# Altium PCB PCB11.PcbDoc
Units mil, origin at the board's own origin, x right, y up, seen from the top; angles counter-clockwise.
Board outline 3605 x 3120 mil, 2 copper layers (Top Layer, Bottom Layer); 30 components, 39 nets, 137 pads, 0 vias.
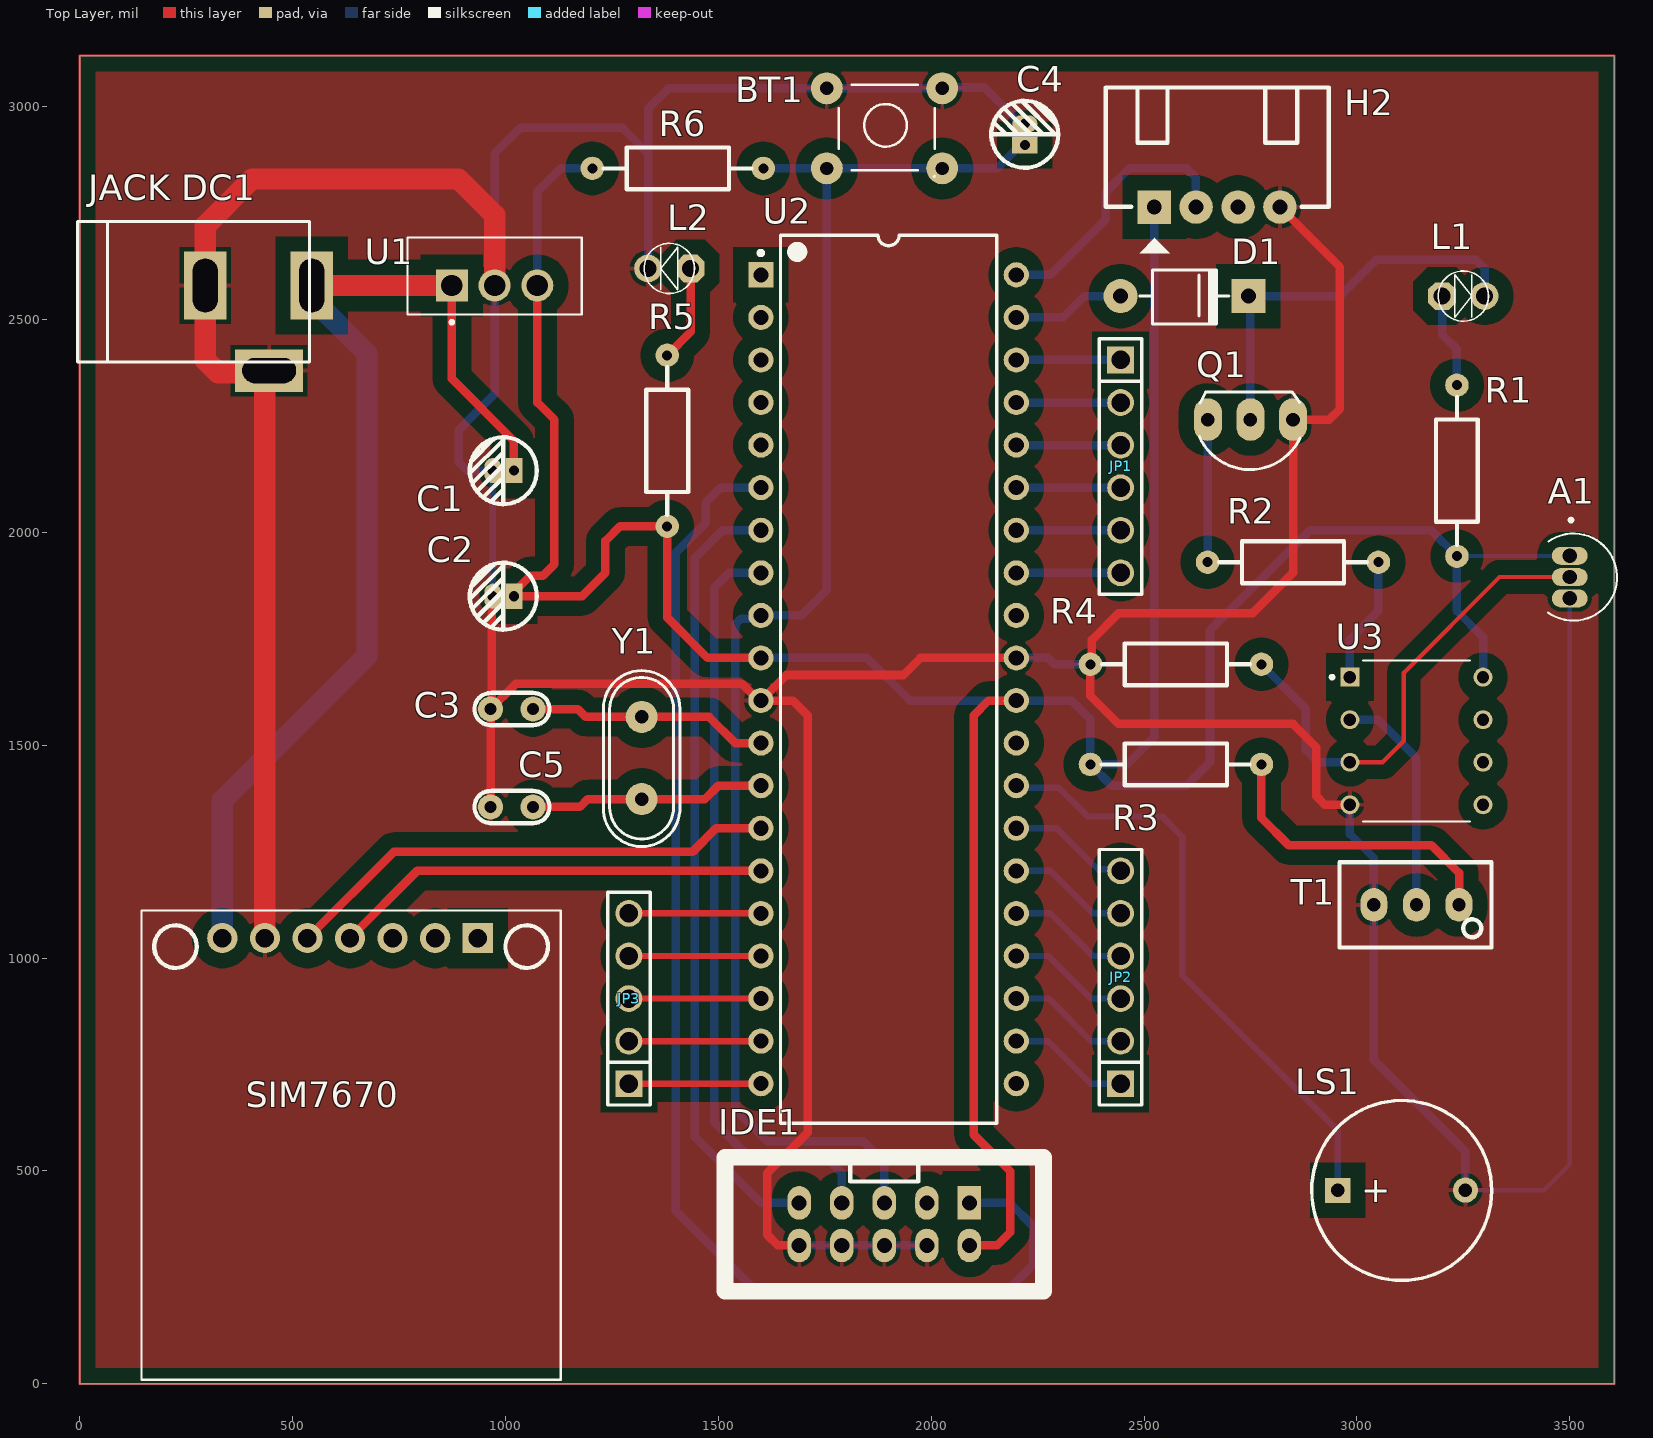
[diagram p0: Top Layer view]
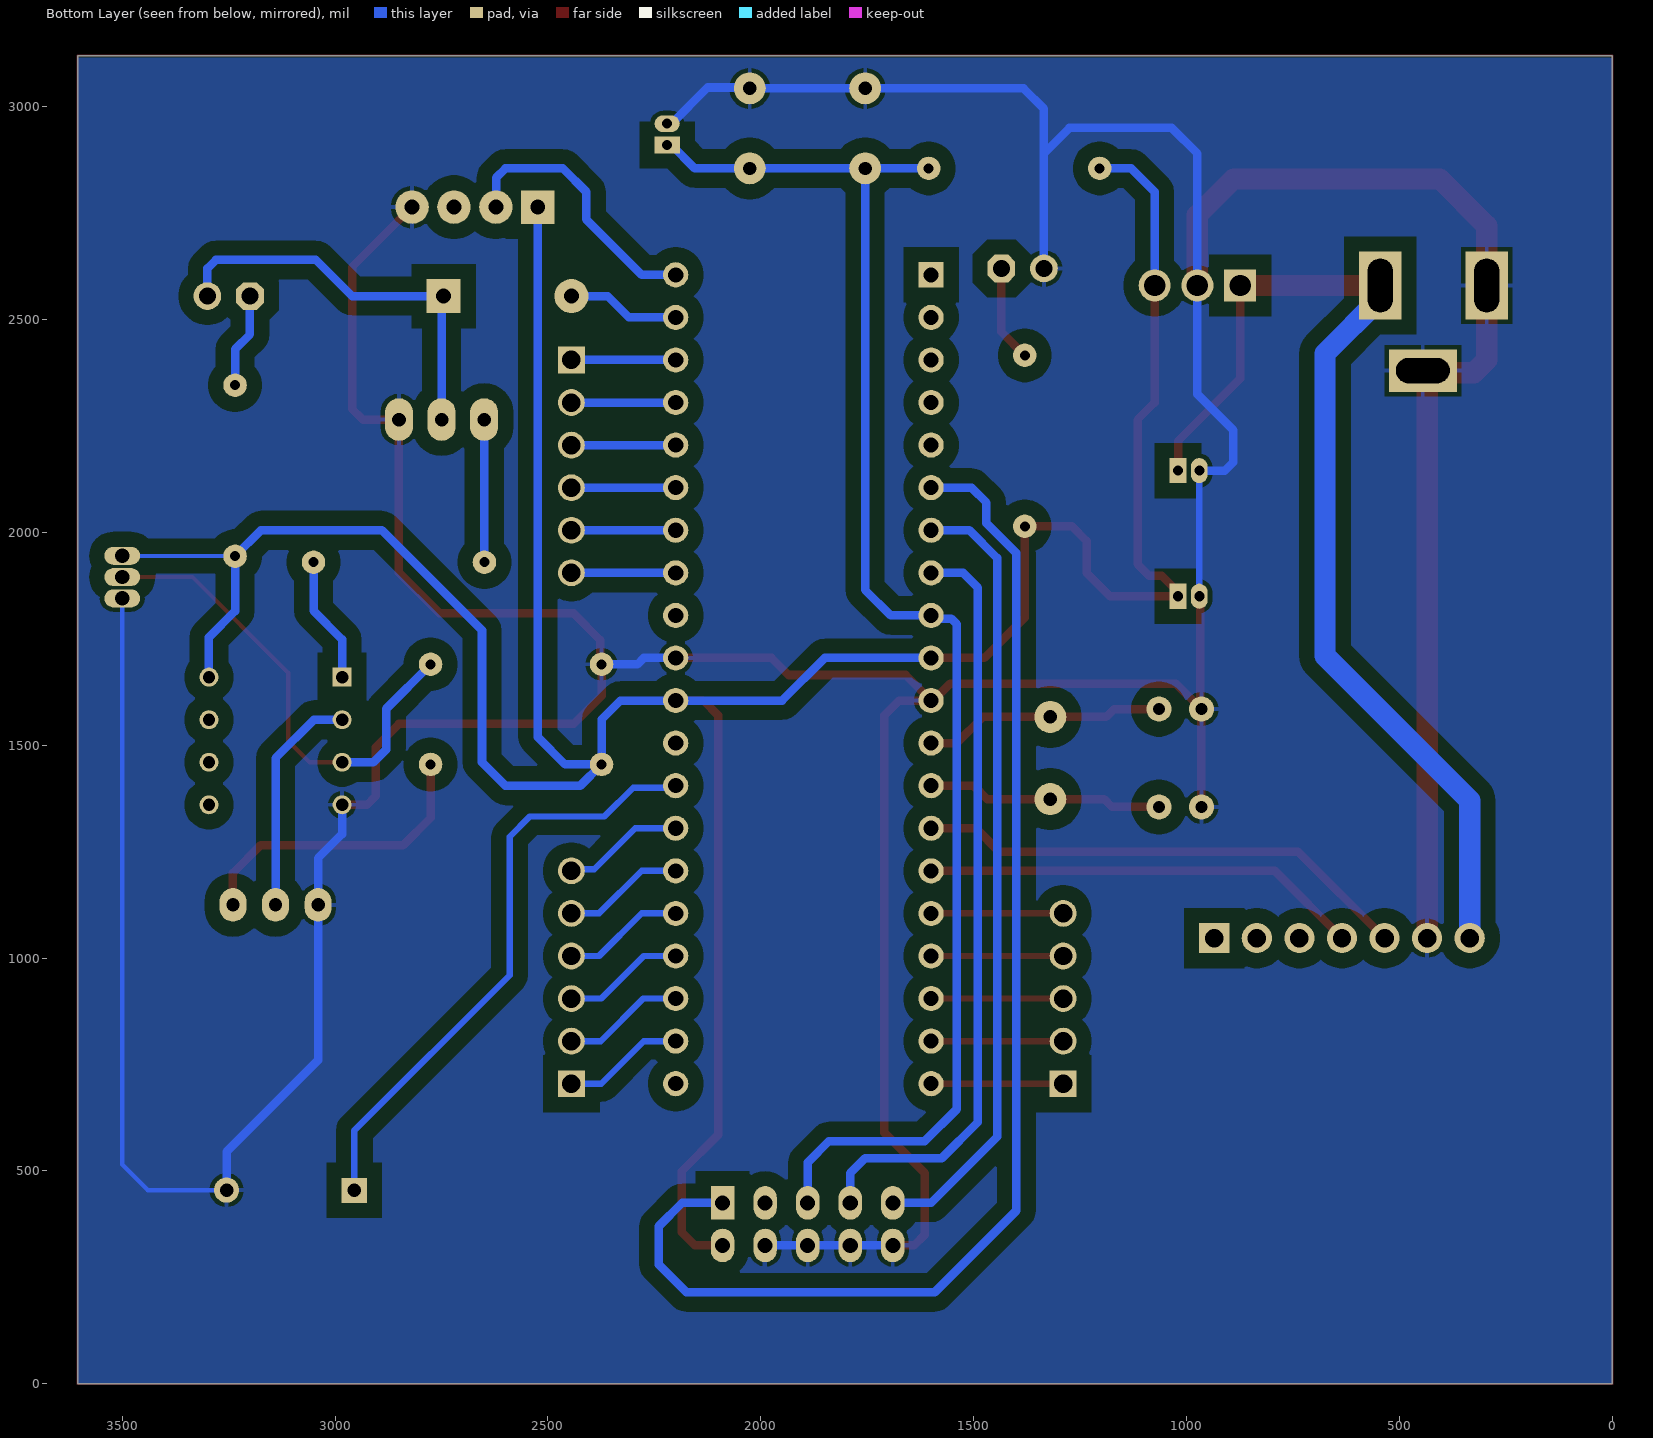
[diagram p1: Bottom Layer view, seen from below]
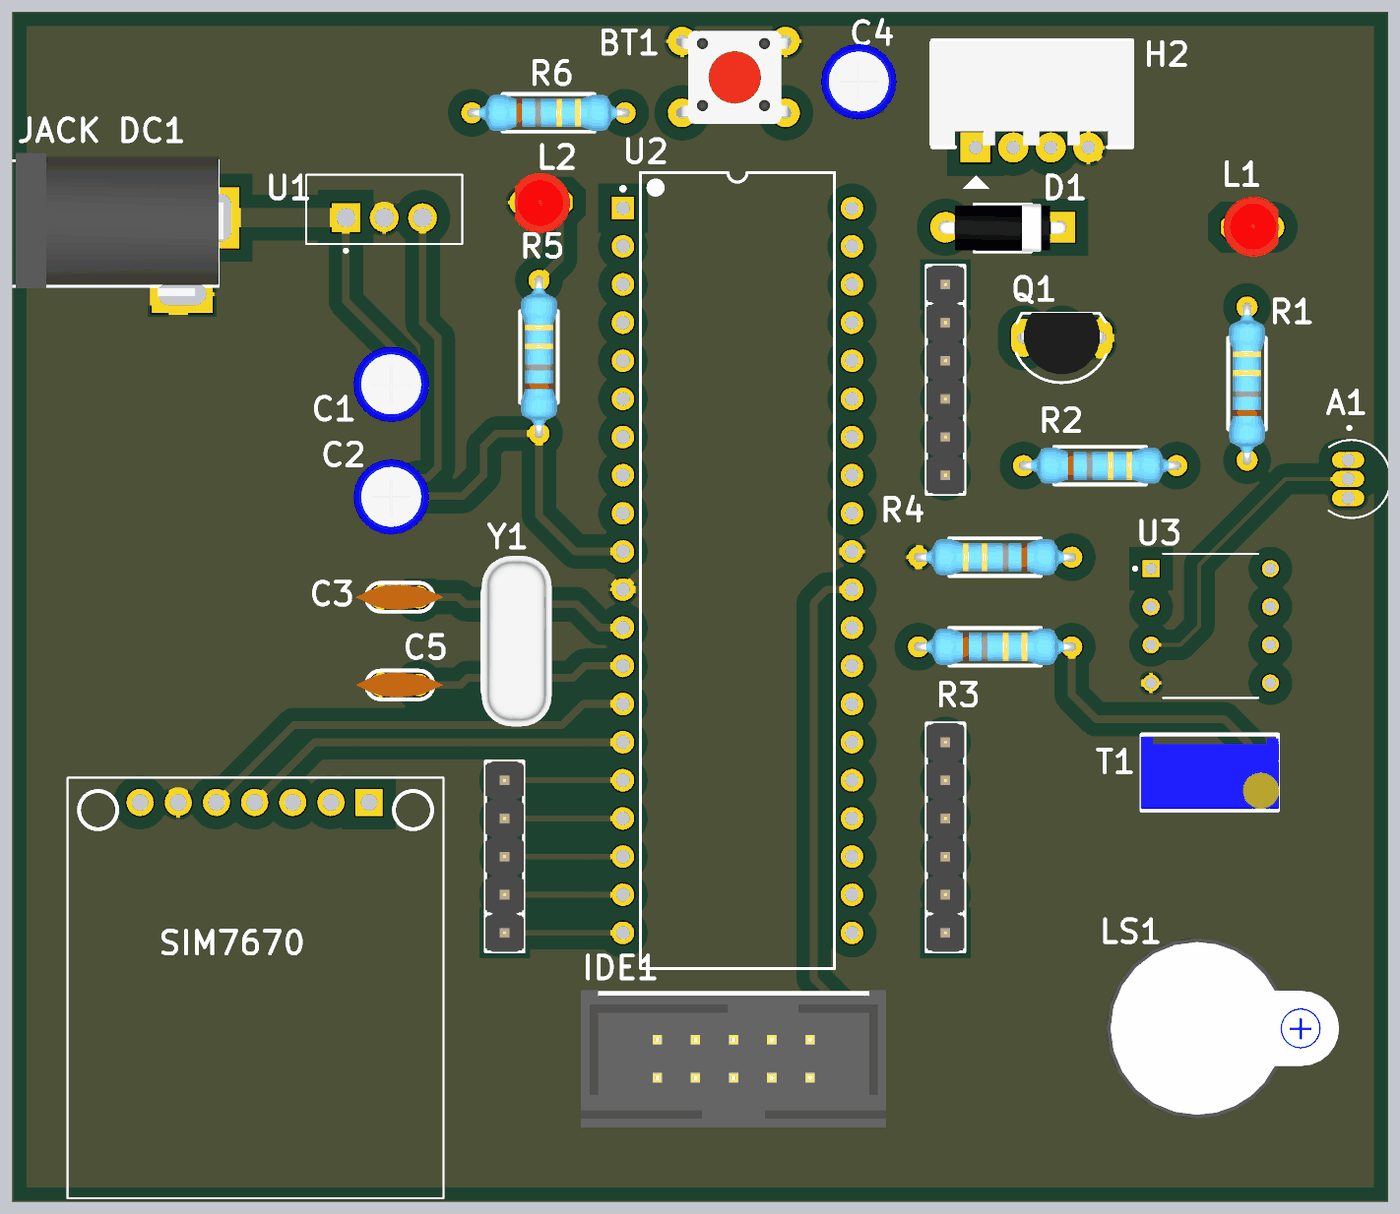
[diagram p2: 3D render of the assembled board from above, using the file's embedded part models]

## Layer stack, top to bottom
Top Solder: solder mask 0.4, Solder Resist, Dk 3.5
Top Layer: signal copper 1.4
Dielectric 1: dielectric 12.6, FR-4, Dk 4.8
Bottom Layer: signal copper 1.4
Bottom Solder: solder mask 0.4, Solder Resist, Dk 3.5

## Board outline
0,0 3605,0 3605,3120 0,3120

## Design rules (kind name [scope] priority, off if disabled: settings)
Clearance [All] p1: gap=35 ignorepadtopadclearanceinfootprint=FALSE
PolygonConnect [All] p1: connectstyle=Relief reliefconductorwidth=10 reliefentries=4 polygonreliefangle="90 Angle" airgapwidth=10
RoutingVias [All] p1: holewidth=28 width=50 viastyle="Through Hole" minholewidth=28 minwidth=50 maxholewidth=28 maxwidth=50
SolderMaskExpansion [All] p1: expansion=4 istentingtop=FALSE
Width [All] p1: maxlimit=50 minlimit=15 preferedwidth=20
30 further rules are at their usual default settings.

## Components (designator, comment, footprint, x,y, rotation, side; value= is the part's Value field where it differs from the comment)
A1 "LM35DZ/NOPB" TO92127P521H735-3 3530.51,1895 r270 top
BT1 "Nut Nhan" "Nut Nhan 4 Chan Cam 6x6" 1768,3051 r0 top
C1 "10uF" "tu hoa 4mm" 995,2145 r180 top
C2 "0.1uF" "tu hoa 4mm" 995,1850 r180 top
C3 "22pF" "tu gom" 1015,1585 r180 top
C4 "10uF" "tu hoa 4mm" 2220,2935 r90 top
C5 "22pF" "tu gom" 1015,1355 r180 top
D1 "100v" "DIODE 1A" 2395,2555 r180 top
H2 "MD GAS" "Header 4P DC 2.54" 2525,2765 r90 top
IDE1 "IDE10" "IDE 10 DT" 2090,425 r180 top
"JACK DC1" "JACK DC 5.5" "JACK DC 5.5" 420,2480 r0 top value="Jac DC"
JP1 "JP 1x6 2.54" "JP 1x6 DT" 2445,2405 r270 top
JP2 "JP 1x6 2.54" "JP 1x6 DT" 2445,705 r90 top
JP3 "JP 1x5 2.54" "JP 1x5 DT" 1290,705 r90 top
L1 "LED 3mm" LED-3MM-RED 3200,2555 r0 top
L2 "LED 3mm" LED-3MM-RED 1435,2620 r180 top
LS1 "Coi Chip Speaker" "Coi Chip Speacker" 2955,454.5 r0 top
Q1 "C1815" TO92 2750,2265 r180 top value=C9014
R1 "1k" "tro vach 1/4w" 3235,2145 r270 top
R2 "10k" "tro vach 1/4w" 2850,1930 r180 top
R3 "10k" "tro vach 1/4w" 2575,1455 r180 top
R4 "1k" "tro vach 1/4w" 2575,1690 r0 top
R5 "470" "tro vach 1/4w" 1380,2215 r270 top
R6 "10k" "tro vach 1/4w" 1405,2855 r180 top
SIM7670 "Component_1" SIM7670X 625,570 r180 top
T1 "10K" "Bien Tro Vi Chinh Dung" 3140,1125 r180 top
U1 "LM7805" TO255P1040X460X1968-3 874.21,2580 r0 top
U2 "ATmega32-16PU" 40P6 1900,1655 r0 top
U3 "LM358N/NOPB" DIP794W45P254L959H508Q8 3140,1510 r0 top
Y1 "12Mhz" "Thach Anh 2 chan cam" 1320,1470 r90 top value=4Mhz

## Footprints (in the part's own frame and the unit in brackets; to place one, negate y for a bottom-side part, rotate by r counter-clockwise, add the part's x,y. Pads: shape width x height; smd on the part's side, far side on the other; paste and mask are expansions set on the pad)
40P6 [mm] "40-Pin Ceramic Dual In-Line Package (CerDIP)"
  rect 1.5x1.5 hole 0.9: 1(-7.62,24.13)
  round 1.5 hole 0.9: 2(-7.62,21.59) 3(-7.62,19.05) 4(-7.62,16.51) 5(-7.62,13.97) 6(-7.62,11.43) 7(-7.62,8.89) 8(-7.62,6.35) 9(-7.62,3.81) 10(-7.62,1.27) 11(-7.62,-1.27) 12(-7.62,-3.81) 13(-7.62,-6.35) 14(-7.62,-8.89) 15(-7.62,-11.43) 16(-7.62,-13.97) 17(-7.62,-16.51) 18(-7.62,-19.05) 19(-7.62,-21.59) 20(-7.62,-24.13) 21(7.62,-24.13) 22(7.62,-21.59) 23(7.62,-19.05) 24(7.62,-16.51) 25(7.62,-13.97) 26(7.62,-11.43) 27(7.62,-8.89) 28(7.62,-6.35) 29(7.62,-3.81) 30(7.62,-1.27) 31(7.62,1.27) 32(7.62,3.81) 33(7.62,6.35) 34(7.62,8.89) 35(7.62,11.43) 36(7.62,13.97) 37(7.62,16.51) 38(7.62,19.05) 39(7.62,21.59) 40(7.62,24.13)
  silkscreen extent -7.74,-26.5 6.45,26.5, body extent -7.05,-26.47 7.05,26.47, height 5.72
"Bien Tro Vi Chinh Dung" [mm] "Bien tro vi chinh"
  oval 1.6x2 hole 0.8: 1(-2.54,0) 2(0,0) 3(2.54,0)
  silkscreen extent -4.47,-2.54 4.6,2.54, body extent -4.54,-2.4 4.66,2.4, height 12.02
"Coi Chip Speacker" [mm]
  rect 1.5x1.5 hole 0.8: 1(0,0)
  round 1.5 hole 0.8: 2(7.62,0.013)
  silkscreen extent -1.55,-5.38 9.18,5.36, body extent -2.22,-6 13.24,6, height 4.5
"DIODE 1A" [mil] "Diode 1A"
  round 80 hole 35: 1(-50,0)
  rect 80x80 hole 35: 2(-350,0)
  silkscreen extent -305,-61 -95,65, body extent -366,-61 -34,65, height 122
DIP794W45P254L959H508Q8 [mm]
  rect 1.13x1.13 hole 0.74: 1(-3.97,3.81)
  round 1.13 hole 0.74: 2(-3.97,1.27) 3(-3.97,-1.27) 4(-3.97,-3.81) 5(3.97,-3.81) 6(3.97,-1.27) 7(3.97,1.27) 8(3.97,3.81)
  silkscreen extent -5.13,-4.79 3.17,4.79
"Header 4P DC 2.54" [mil]
  rect 78.74x78.74 hole 35: 1(-1,1)
  round 78.74 hole 35: 2(-1,-97.43) 3(-1,-195.85) 4(-1,-294.28)
  silkscreen extent -110,-409 280,115, body extent 5,-413 278,123, height 290
"IDE 10 DT" [mm] "Connector; Header; 5x2 Position"
  rect 1.4x2 hole 0.9: 1(0,0)
  oval 1.4x2 hole 0.9: 2(0,2.54) 3(2.54,0) 4(2.54,2.54) 5(5.08,0) 6(5.08,2.54) 7(7.62,0) 8(7.62,2.54) 9(10.16,0) 10(10.16,2.54)
  silkscreen extent -4.42,-2.73 14.58,5.27, body extent -5.08,-3.3 15.24,5.84, height 9.86
"JACK DC 5.5" [mil] "Jac DC input"
  rect 100x160 hole 59.06 slot 125.98 at 90 deg: 1(125,100) 2(-125,100)
  rect 160x100 hole 59.06 slot 125.98 at 0 deg: 3(25,-100)
  silkscreen extent -425,-80 120,250, body extent -410,-105 134,269, height 434
"JP 1x5 DT" [mm] "5 pins, 1 row, straight, gold plating"
  rect 1.6x1.6 hole 1.1: 1(0,0)
  round 1.6 hole 1.1: 2(2.54,0) 3(5.08,0) 4(7.62,0) 5(10.16,0)
  silkscreen extent -1.27,-1.27 11.43,1.27, body extent -1.27,-1.27 11.43,1.27, height 8.54
"JP 1x6 DT" [mm] "6 pins, 1 row, straight, gold plating"
  rect 1.6x1.6 hole 1.1: 1(0,0)
  round 1.6 hole 1.1: 2(2.54,0) 3(5.08,0) 4(7.62,0) 5(10.16,0) 6(12.7,0)
  silkscreen extent -1.27,-1.27 13.97,1.27, body extent -1.27,-1.27 13.97,1.27, height 8.54
LED-3MM-RED [mil]
  oct 65x65 hole 40: 1(0,0)
  round 65 hole 40: 2(100,0)
  silkscreen extent -9,-59 109,59, body extent -27,-77 117,80, height 181
"Nut Nhan 4 Chan Cam 6x6" [mil] "SW button 4pin, 250 x250 mil"
  round 75 hole 31: 1(-13,-8) 1(258,-8) 2(-13,-196) 2(258,-196)
  silkscreen extent 15,-215 240,0, body extent -31,-225 281,19, height 276
SIM7670X [mm]
  rect 1.8x1.8 hole 1.1: 1(-7.874,-12.114)
  round 1.8 hole 1.1: 2(-5.334,-12.114) 3(-2.794,-12.114) 4(-0.254,-12.114) 5(2.286,-12.114) 6(4.826,-12.114) 7(7.366,-12.114)
  silkscreen extent -12.83,-13.77 12.19,14.25
"Thach Anh 2 chan cam" [mm]
  round 1.905 hole 0.8: 1(-2.45,0) 2(2.45,0)
  silkscreen extent -5.28,-2.29 5.21,2.29, body extent -5.68,-2.36 5.68,2.29, height 3.5
TO92 [mil] "TO-92"
  oval 66x100 hole 32: 1(-100,0) 2(0,0) 3(100,0)
  silkscreen extent -117,-65 120,118, body extent -109,-66 109,95, height 245
TO255P1040X460X1968-3 [mm]
  rect 1.91x1.91 hole 1.27: 1(0,0)
  round 1.91 hole 1.27: 2(2.55,0) 3(5.1,0)
  silkscreen extent -2.65,-2.29 7.75,2.86
TO92127P521H735-3 [mm]
  oval 1.07x2.14 hole 0.85: 1(-1.27,-0.775) 2(0,-0.775) 3(1.27,-0.775)
  silkscreen extent -3.5,-2.08 2.6,2.04
"tro vach 1/4w" [mm]
  round 1.4 hole 0.6: 1(-5.1,0) 2(5.1,0)
  silkscreen extent -4.39,-1.25 4.42,1.25, body extent -5.38,-1.2 5.38,1.2, height 2.41
"tu gom" [mm] "Tu gom mini"
  round 1.5 hole 0.7: 1(-1.27,0) 2(1.27,0)
  silkscreen extent -2.25,-0.97 2.22,0.97, body extent -2.92,-0.85 2.92,0.85, height 6.12
"tu hoa 4mm" [mm]
  rect 1x1.5 hole 0.6: 1(-0.635,0)
  oval 1x1.5 hole 0.6: 2(0.635,0)
  silkscreen extent -2,-2 2.01,2.01, body extent -2.47,-2.47 2.58,2.58, height 14.81

## Part data
A1 U1: Package=None, Availability=Unavailable, Price=None
  A1: MP=LM35DZ/NOPB
  U1: MP=LM7805
BT1: library part "Nut Nhan 4 Chan Cam 6x6", "Nut Nhan 4 Chan 6x6mm", Ma_Hang=MH004584, Ten="Nút Nhấn 4 Chân 6x6x5MM DIP"
C1 C2: library part "Tu Hoa 2.2uF 50V 4x7", "Cắm", Chung_Loai=Cắm, Don_Vi=Con, Ma_Hang=MH001356, So_Chan=2, Ten_Linh_Kien="Tụ Hóa 2.2uF 50V 4x7MM"
C3 C5: library part "Tu gom 22pF 50V", "Cắm", Chung_Loai=Cắm, Don_Vi=Con, Ma_Hang=MH004771, So_Chan=2, Ten_Linh_Kien="Tụ gốm 22P 50V"
C4: library part "Tu Hoa 10uF 25V 4x7", "Cắm", Chung_Loai=Cắm, Don_Vi=Con, Ma_Hang=MH001349, So_Chan=2, Ten_Linh_Kien="Tụ Hóa 10uF 25V 4x7MM"
D1: library part "Diode 1N4007", "Cắm", Chung_Loai=Cắm, Don_Vi=Con, Ma_Hang=MH001063, Ten_Linh_Kien="Diode 1N4007 1A (DIP)"
H2: library part "Header 4P 2.54 Duc Cong", "Cắm", Chung_Loai=Cắm, Don_Vi=Con, Ma_Hang=MH001310, Ten_Linh_Kien="Header 4P XH2.54-4P Đực Cong"
IDE1: library part "IDE 10 DT"
JP1 JP2: library part "JP 1x6 2.54 Duc Thang", "Cắm", Chung_Loai=Cắm, Don_Vi=Con, Ma_Hang=MH000903, Ten_Linh_Kien="Jump Đơn Đực 2.54MM 1x40P Thẳng 11MM"
JP3: library part "JP 1x5 2.54 Duc Thang", "Cắm", Chung_Loai=Cắm, Don_Vi=Con, Ma_Hang=MH000903, Ten_Linh_Kien="Jump Đơn Đực 2.54MM 1x40P Thẳng 11MM"
L1 L2: library part "LED 3mm Do", "Cắm", Chung_Loai=Cắm, Don_Vi=Con, Ma_Hang=MH003892, Ten_Linh_Kien="Led 3MM Phủ Đỏ (10c)"
LS1: "Còi chip"
Q1: "NPN transistor"
R1 R2 R3 R5: library part "Tro Vach 1/4W 5% 10k", "Căm", Chung_Loai=Cắm, Don_Vi=Con, Ma_Hang=MH007354, So_Chan=2, Ten_Linh_Kien="Trở Vạch 1/4w 5% 10K"
R4 R6: library part "Tro Vach 1/4W 5% 1k", "Cắm", Chung_Loai=Cắm, Don_Vi=Con, Ma_Hang=MH007390, So_Chan=2, Ten_Linh_Kien="Trở Vạch 1/4w 5% 1k"
T1: library part "Bien Tro Tinh Chinh 10K Dung", "Cắm", Chung_Loai=Cắm, Don_Vi=Con, Ma_Hang=MH003232, Ten_Linh_Kien="Biến Trở VR 103-10K 3296W"
U2: library part ATMEGA32-16PU, "8-bit AVR Microcontroller, 4.5-5.5V, 16MHz, 32KB Flash, 1024 Bytes EEPROM, 2KB SRAM, 40-pin PDIP, Industrial Grade (-40°C to 85°C)", Code_JEDEC=MS-011-AC, ComponentLink1Description="Manufacturer URL", ComponentLink1URL=http://www.atmel.com/, ComponentLink2Description="ATmega32(L) Datasheet", ComponentLink2URL=http://atmel.com/dyn/resources/prod_documents/doc2503.pdf, ComponentLink3Description="ATmega32(L) Summary", ComponentLink3URL=http://atmel.com/dyn/resources/prod_documents/2503S.pdf, DatasheetVersion="revQ, Feb-2011", PackageDescription="40-lead (0.600\"/15.24mm Wide) Plastic Dual Inline Package (PDIP)", PackageReference=40P6, PackageVersion="revB, Sep-2001", PartNumber=ATMEGA32-16PU
U3: "<a href=\"https://snapeda.com/parts/LM358N/NOPB/Texas%20Instruments/view-part/?ref=eda\">Check prices</a>", Package=None, Availability=Unavailable, MP=LM358N/NOPB, Price=None
Y1: library part "Thach Anh 2 chan Cam", "Crystal For all Crystal 2pin."

## Nets (pads, with @x,y where several pads share a name; then routed paths per layer and width w, separated by ;. In a path a pad name is that pad's centre, name@x,y a point inside that pad or via, vN(x,y) a via of type N, cw(c..) or ccw(c..) an arc to the next point about the centre after c; other vN are vias at no path point)
+5: A1.1 C2.1 H2.1 IDE1.2 R1.2 R3.2 R5.2 R6.2 U1.3 U2.10 U2.30 U3.8 | length 7866.8
  Top Layer w20: U1.3 1075,2305 1115,2265 1115,1925 1087.81,1897.81 1057.97,1897.81 1020,1859.84 C2.1 1180,1850 1235,1905 1235,1980 1269.21,2014.21 R5.2 1380,1800 1475,1705 U2.10 ; IDE1.2 2155,325 2186.25,356.25 2186.25,498.75 2100,585 2100,1570 2135,1605 U2.30
  Bottom Layer w10: R1.2 3235.39,1944.61 3499.61,1944.61 A1.1
  Bottom Layer w20: U1.3 1075,2800 1130,2855 R6.2 ; U2.10 1850,1705 1950,1605 U2.30 2330,1605 2374.21,1560.79 R3.2 ; H2.1 2524,1519 2460,1455 R3.2 ; U3.8 3296.3,1753.7 3235,1815 R1.2 3174.21,2005 2890,2005 2655,1770 2655,1460 2600,1405 2424.21,1405 R3.2
Coi: LS1.1 U2.28 | length 1421.4
  Bottom Layer w15: U2.28 2205,1400 2300,1400 2367.5,1332.5 2542.5,1332.5 2590,1285 2590,960 2955,595 LS1.1
GND: "JACK DC1.2" "JACK DC1.3" A1.3 BT1.1 C1.2 C2.2 C3.2 C4.2 C5.2 H2.4 IDE1.4 IDE1.6 IDE1.8 IDE1.10 L2.2 LS1.2 Q1.1 R4.1 SIM7670.6 T1.3 U1.2 U2.11 U2.31 U3.4 | length 14448.5
  Top Layer w20: C5.2 C3.2 C3.2@967.5,1587.5 ; C2.2 967.5,1847.5 C3.2@967.5,1587.5 ; IDE1.10 1640,325 1615,350 1615,495 1710,590 1710,1570 1675,1605 U2.11 ; U2.31 1975,1705 1935,1665 1660,1665 U2.11 ; H2.4 2960,2623.28 2960,2290 2935,2265 Q1.1 2850,1905 2755,1810 2440,1810 2377.56,1747.56 2377.56,1693.35 R4.1 2374.21,1615.79 2440,1550 2850,1550 2905,1495 2905,1380 2925,1360 U3.4 ; C3.2@967.5,1587.5 1024.53,1644.53 1555.34,1644.53 1594.87,1605 U2.11
  Top Layer w50: SIM7670.6 435,2370 440,2375 ; 445,2380 440,2375 ; U1.2 974.61,2745.39 890,2830 405,2830 295,2720 295,2580 295,2405 325,2375 440,2375
  Bottom Layer w10: LS1.2 3440,455 3500,515 A1.3
  Bottom Layer w15: C2.2 C1.2
  Bottom Layer w20: C1.2 910,2145 890,2165 890,2240 974.61,2324.61 U1.2 974.61,2889.61 1035,2950 1275,2950 1335,2890 ; L2.2 1335,2890 ; IDE1.10 IDE1.8 IDE1.6 IDE1.4 ; U2.31 2275,1705 2290,1690 R4.1 ; C4.2 2210.16,2960 2125.16,3045 2028,3045 2026,3043 1755,3043 1383,3043 1335,2995 1335,2890 ; U3.4 2983.7,1291.3 3040,1235 T1.3 3040,760 3255,545 LS1.2
Khoi: H2.2 U2.40 | length 641.9
  Bottom Layer w20: U2.40 2280,2605 2410,2735 2410,2800 2465,2855 2600,2855 2621.63,2833.37 2621.63,2764.8 H2.2
MISO: IDE1.9 U2.7 | length 1851.1
  Bottom Layer w20: U2.7 1510,2005 1445,1940 1445,580 1600,425 IDE1.9
MOSI: IDE1.1 U2.6 | length 3045.9
  Bottom Layer w20: U2.6 1505,2105 1470,2070 1470,2021.57 1400,1951.57 1400,406.72 1591.72,215 2175,215 2240,280 2240,370 2185,425 IDE1.1
NetA1_2: A1.2 R4.2 U3.3 | length 1149.5
  Top Layer w10: U3.3 3060,1460 3110,1510 3110,1670 3335,1895 A1.2
  Bottom Layer w20: R4.2 2880,1585.79 2880,1490 2910,1460 U3.3
NetC3_1: C3.1 U2.12 Y1.2 | length 568.1
  Top Layer w20: C3.1 1170,1585 1188.54,1566.46 Y1.2 1478.54,1566.46 1540,1505 U2.12
NetC5_1: C5.1 U2.13 Y1.1 | length 555.7
  Top Layer w20: C5.1 1175,1355 1193.54,1373.54 Y1.1 1468.54,1373.54 1500,1405 U2.13
NetD1_2: D1.2 L1.2 Q1.2 | length 955.6
  Bottom Layer w20: Q1.2 2750,2550 D1.2 2960,2555 3045,2640 3280,2640 3300,2620 L1.2
NetJP1_1: JP1.1 U2.38 | length 245
  Bottom Layer w20: U2.38 JP1.1
NetJP1_2: JP1.2 U2.37 | length 245
  Bottom Layer w20: U2.37 JP1.2
NetJP1_3: JP1.3 U2.36 | length 245
  Bottom Layer w20: U2.36 JP1.3
NetJP1_4: JP1.4 U2.35 | length 245
  Bottom Layer w20: U2.35 JP1.4
NetJP1_5: JP1.5 U2.34 | length 245
  Bottom Layer w20: U2.34 JP1.5
NetJP1_6: JP1.6 U2.33 | length 245
  Bottom Layer w20: U2.33 JP1.6
NetJP2_1: JP2.1 U2.22 | length 286.4
  Bottom Layer w15: U2.22 2275,805 2375,705 JP2.1
NetJP2_2: JP2.2 U2.23 | length 286.4
  Bottom Layer w15: U2.23 2275.96,905 2375.96,805 JP2.2
NetJP2_3: JP2.3 U2.24 | length 286.4
  Bottom Layer w15: U2.24 2275,1005 2375,905 JP2.3
NetJP2_4: JP2.4 U2.25 | length 286.4
  Bottom Layer w15: U2.25 2280,1105 2380,1005 JP2.4
NetJP2_5: JP2.5 U2.26 | length 286.4
  Bottom Layer w15: U2.26 2280,1205 2380,1105 JP2.5
NetJP2_6: JP2.6 U2.27 | length 286.4
  Bottom Layer w15: U2.27 2295,1305 2391,1209 2441,1209 JP2.6
NetJP3_1: JP3.1 U2.20 | length 310
  Top Layer w15: JP3.1 U2.20
NetJP3_2: JP3.2 U2.19 | length 310
  Top Layer w15: JP3.2 U2.19
NetJP3_3: JP3.3 U2.18 | length 310
  Top Layer w15: JP3.3 U2.18
NetJP3_4: JP3.4 U2.17 | length 310
  Top Layer w15: JP3.4 U2.17
NetJP3_5: JP3.5 U2.16 | length 310
  Top Layer w15: JP3.5 U2.16
NetL1_1: L1.1 R1.1 | length 223.7
  Bottom Layer w20: L1.1 3200,2465 3235,2430 R1.1
NetL2_1: L2.1 R5.1 | length 227
  Top Layer w20: R5.1 1435,2470.79 L2.1
NetQ1_3: Q1.3 R2.2 | length 335.3
  Bottom Layer w20: R2.2 2649.61,1930.39 2649.61,2264.61 Q1.3
NetR3_1: R3.1 T1.1 | length 718.5
  Top Layer w20: R3.1 2775.79,1329.21 2840,1265 3175,1265 3240,1200 T1.1
NetT1_2: T1.2 U3.2 | length 538.6
  Bottom Layer w20: U3.2 3050,1560 3140,1470 T1.2
Nhiet: D1.1 U2.39 | length 265.7
  Bottom Layer w20: U2.39 2310,2505 2360,2555 D1.1
OUTA: R2.1 U3.1 | length 297.8
  Bottom Layer w20: U3.1 2983.7,1748.7 3050.79,1815.79 R2.1
RST: BT1.2 C4.1 IDE1.5 R6.1 U2.9 | length 3511.7
  Bottom Layer w20: R6.1 BT1.2@1755,2855 ; IDE1.5 1890,520 1840,570 1615,570 1540,645 1540,1784.56 1552.97,1797.53 1592.53,1797.53 U2.9 1695,1805 1755,1865 BT1.2@1755,2855 ; C4.1 2210.16,2910 2155.16,2855 2026,2855 BT1.2@1755,2855
RXD: SIM7670.5 U2.14 | length 1171.9
  Top Layer w20: SIM7670.5 738.07,1250 1440,1250 1495,1305 U2.14
SCK: IDE1.7 U2.8 | length 1799.2
  Bottom Layer w20: U2.8 1525,1905 1490,1870 1490,615 1575,530 1755,530 1790,495 IDE1.7
TXD: SIM7670.4 U2.15 | length 1030.5
  Top Layer w20: SIM7670.4 793.07,1205 U2.15
VCC: "JACK DC1.1" C1.1 SIM7670.7 U1.1 | length 2552.4
  Top Layer w20: U1.1 874.21,2360.79 1020,2215 C1.1
  Top Layer w50: 545,2580 U1.1
  Bottom Layer w50: SIM7670.7 335,1370 675,1710 675,2420 545,2550 545,2580
pads on no net: H2.3 IDE1.3 SIM7670.1 SIM7670.2 SIM7670.3 U2.1 U2.2 U2.3 U2.4 U2.5 U2.21 U2.29 U2.32 U3.5 U3.6 U3.7
copper on no net: | length 13450
  Top Layer w5: 0,0 0,3120 3540,3120 3605,3120 3605,0 0,0

## Polygon pours and split planes (outlines as drawn)
GND on Top Layer "Top poly" (solid, remove dead copper, pour order 0): 3605,3120 3605,0 0,0 0,3120
GND on Bottom Layer "Bot poly" (solid, remove dead copper, pour order 1): 0,3120 5,3115 3605,3115 3605,0 0,0

## Text inside footprints (layer, text, board x,y; h text height)
LS1: Top Overlay "+" at 3010.5,426.5 h60